# Altium PCB QUTMS_CMU_type2_v4.PcbDoc (part 1 of 2)
Units mm, origin at the board's own origin, x right, y up, seen from the top; angles counter-clockwise.
Board outline 198.55 x 64 mm, 4 copper layers (Top Layer, Signal Layer 1, Signal Layer 2, Bottom Layer), stack 0.778 mm thick; 180 components, 148 nets, 510 pads, 376 vias.
Unrouted connection lines stored in the file: 7.
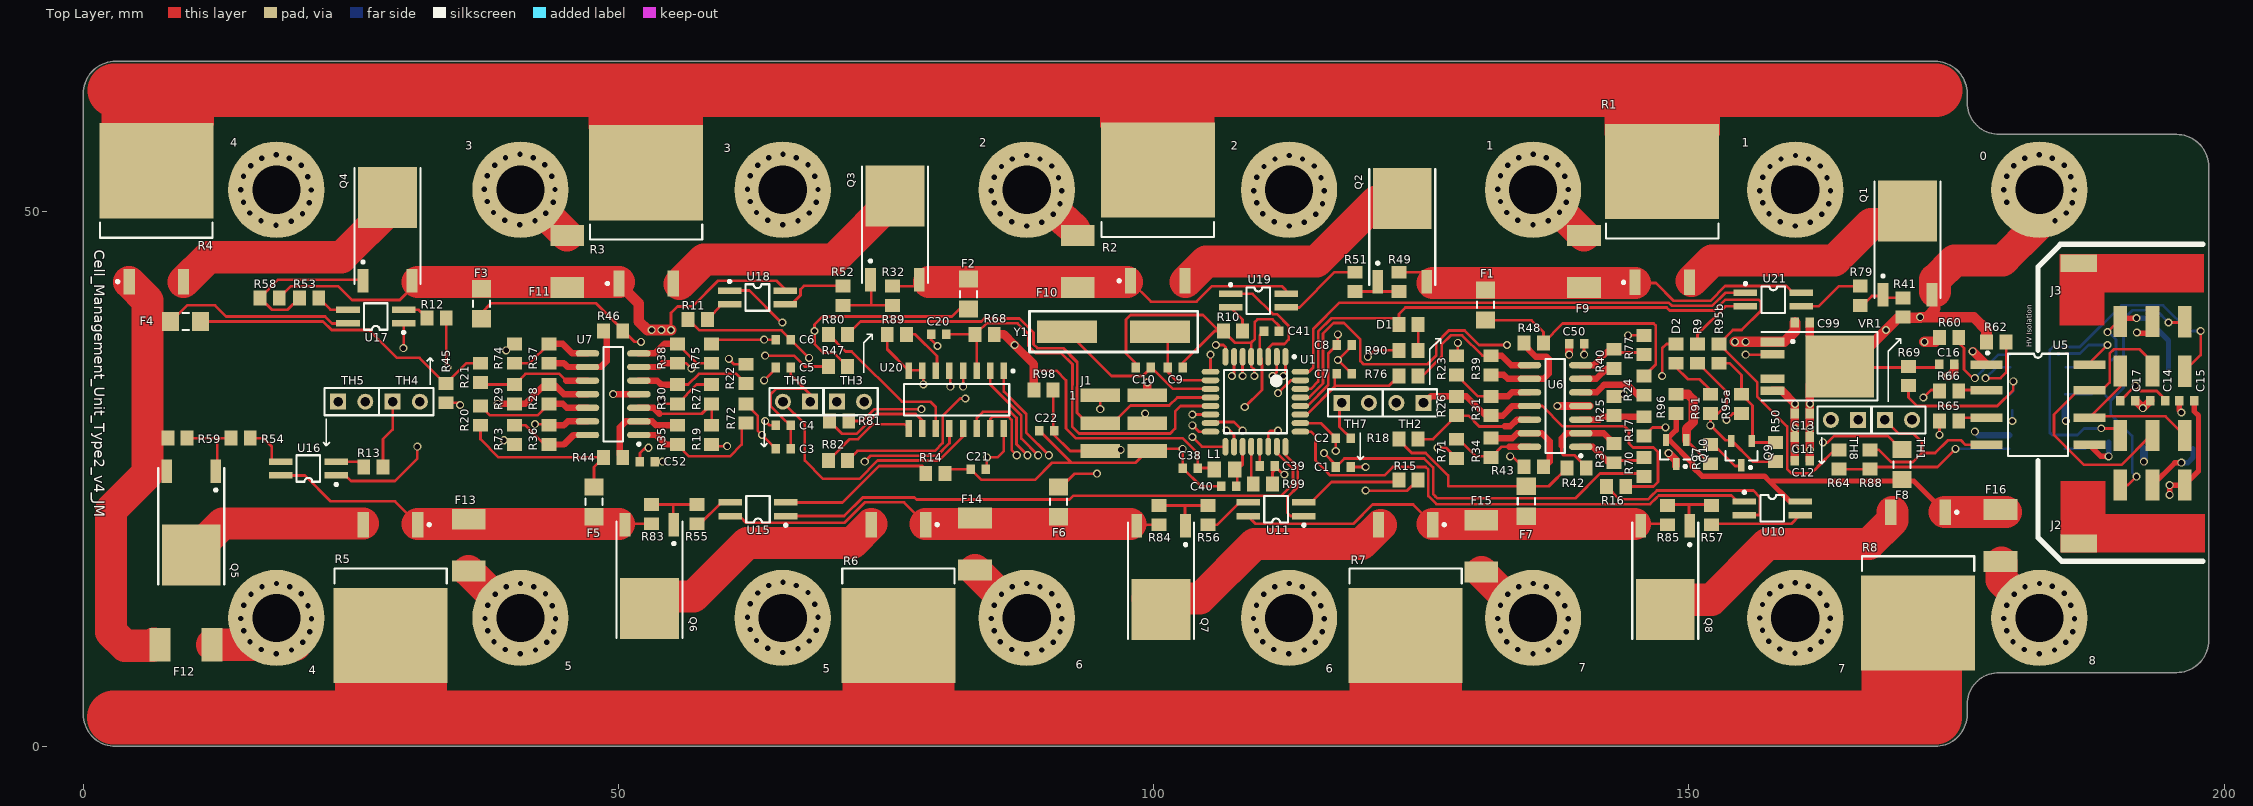
[diagram p0: Top Layer view]
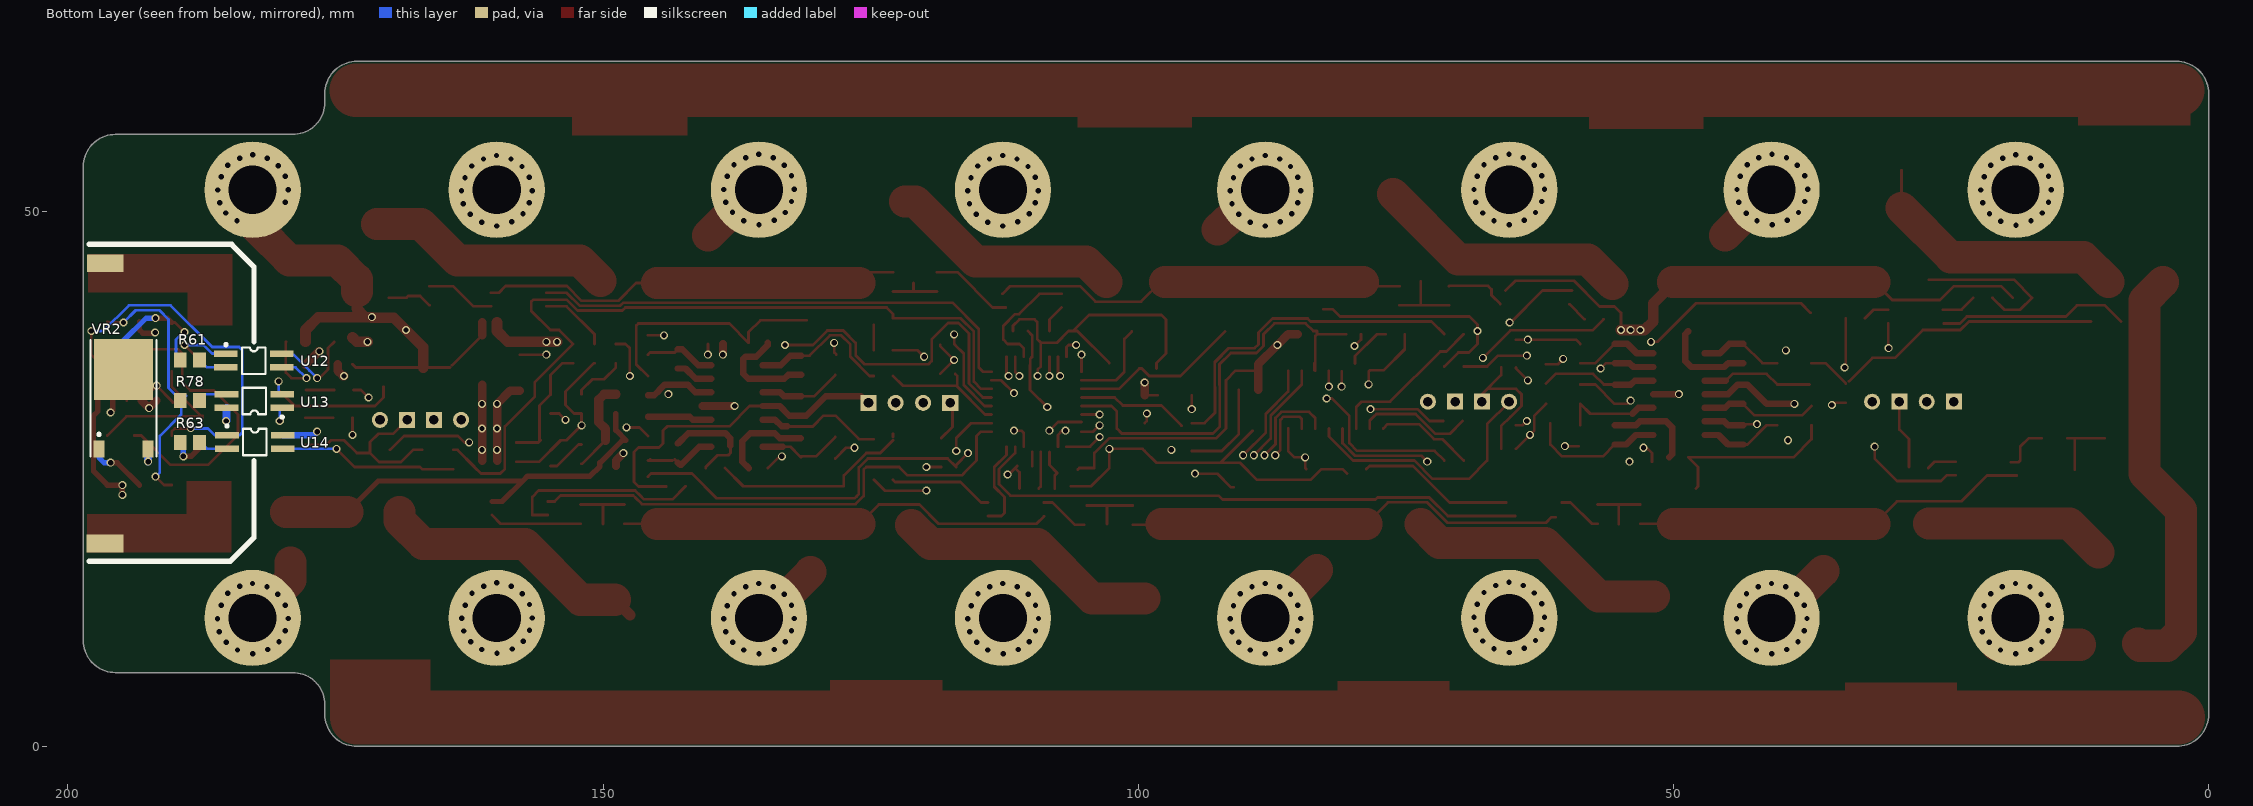
[diagram p1: Bottom Layer view, seen from below]
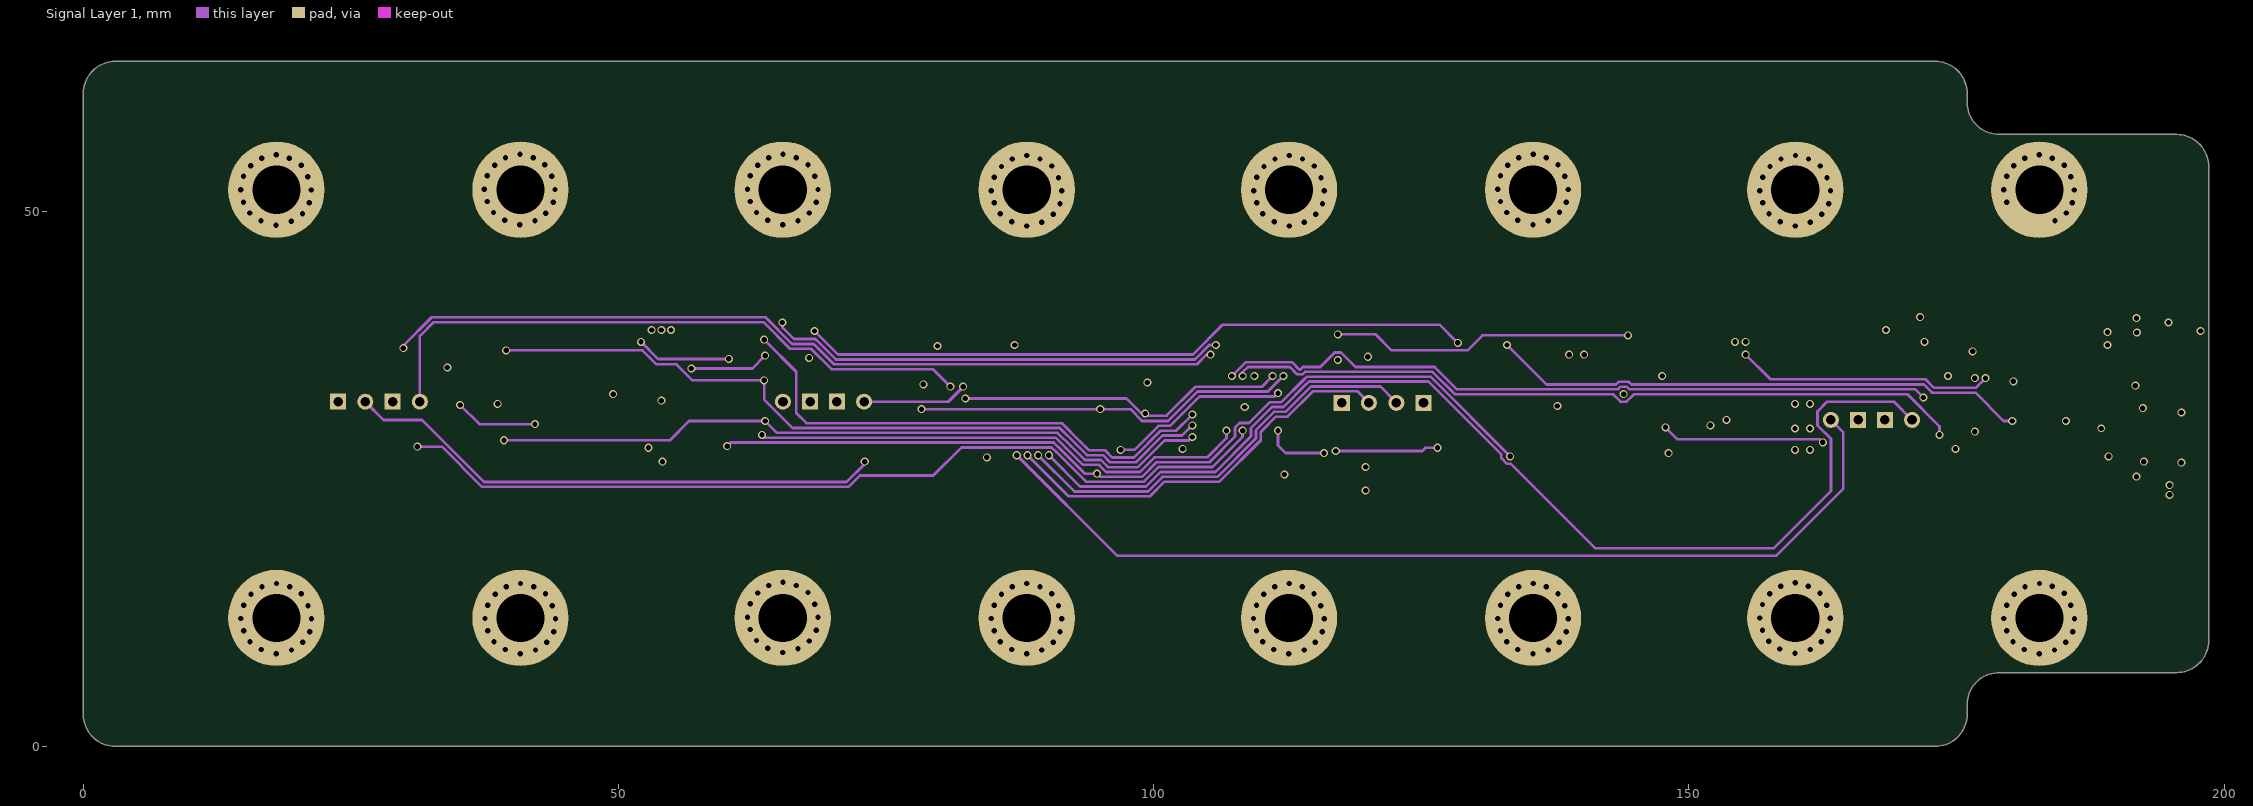
[diagram p2: Signal Layer 1]
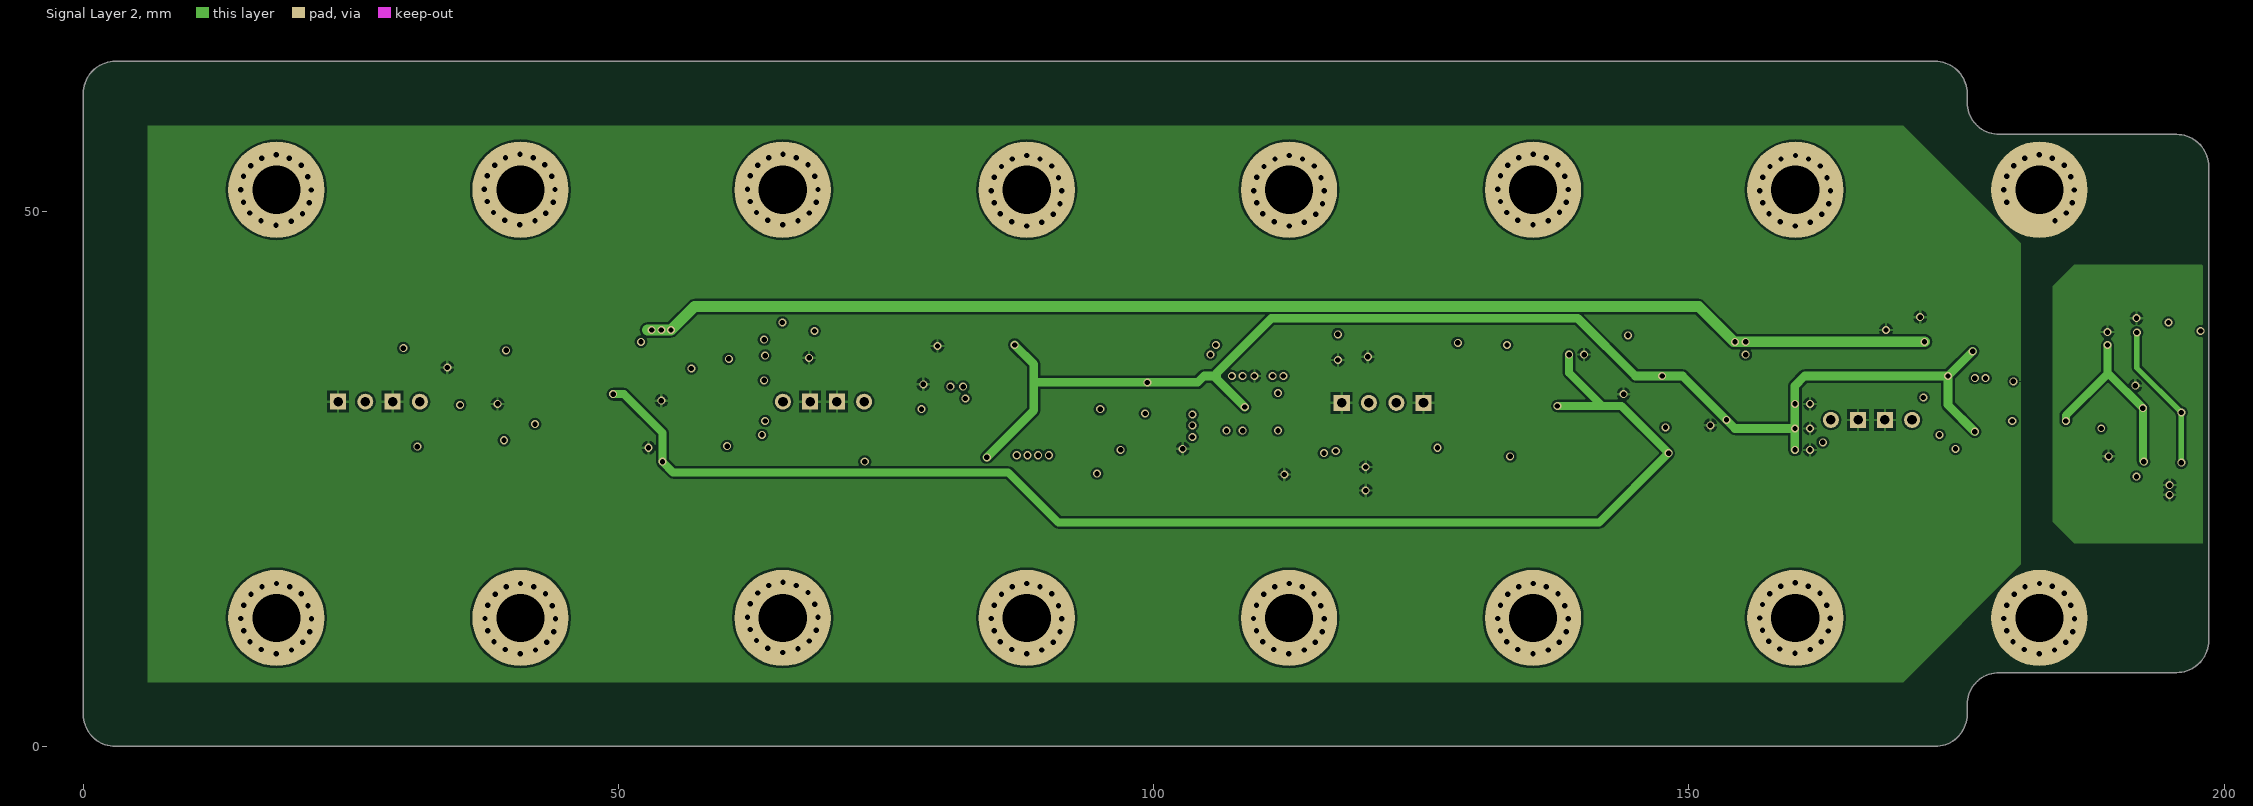
[diagram p3: Signal Layer 2]
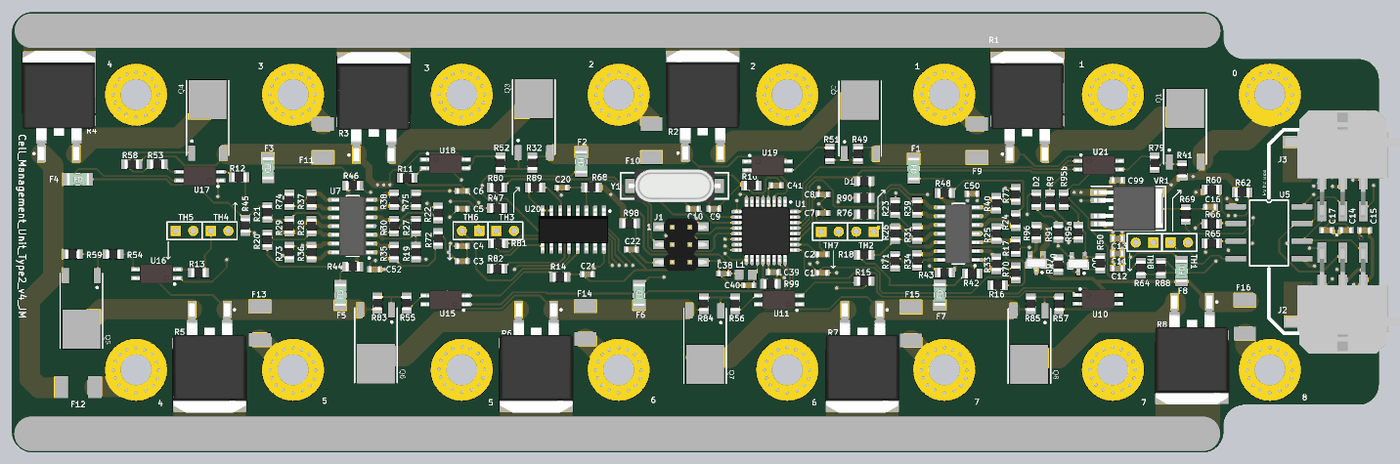
[diagram p5: 3D render of the assembled board from above, using the file's embedded part models]
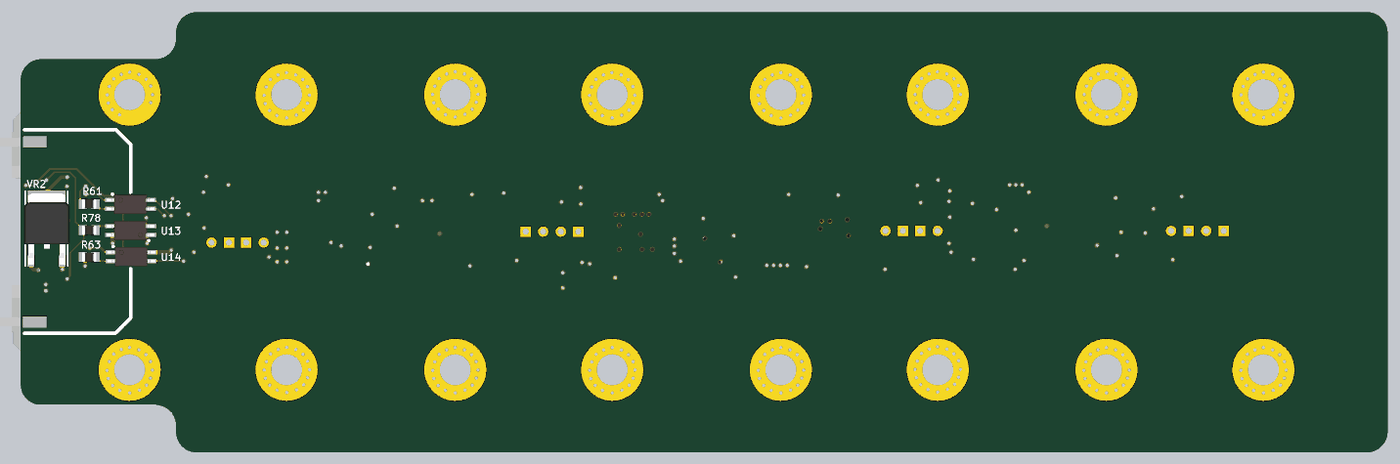
[diagram p6: 3D render of the assembled board from below, using the file's embedded part models]

## Layer stack, top to bottom
Top Solder: solder mask 0.0102, Solder Resist, Dk 3.5
Top Layer: signal copper 0.0356
Dielectric1: core 0.254, FR-4, Dk 4.2
Signal Layer 1: signal copper 0.036
Dielectric 3: prepreg 0.127, Dk 4.2
Signal Layer 2: signal copper 0.036
Dielectric 4: core 0.254, Dk 4.2
Bottom Layer: signal copper 0.0356
Bottom Solder: solder mask 0.0102, Solder Resist, Dk 3.5

## Board outline
3,0 cw(c3,3) 0,3 0,61 cw(c3,61) 3,64 172.987,64 cw(c172.987,61) 175.987,61 175.987,60.17 ccw(c178.987,60.17) 178.987,57.17 195.55,57.17 cw(c195.55,54.17) 198.55,54.17 198.55,9.895 cw(c195.55,9.895) 195.55,6.895 178.987,6.895 ccw(c178.987,3.895) 175.987,3.895 175.987,3 cw(c172.987,3) 172.987,0

## Design rules (kind name [scope] priority, off if disabled: settings)
Clearance [All] p1: gap=0.2
ComponentClearance [All] p1: gap=0 collisioncheckmode=3 verticalgap=0 showdistances=FALSE
HoleSize [All] p1: absolutevalues=TRUE maxlimit=5 minlimit=0.025 maxpercent=80.000 minpercent=20.000
NetAntennae [All] p1: netantennaetolerance=100
PolygonConnect [All] p1: connectstyle=Relief reliefconductorwidth=0.254 reliefentries=4 polygonreliefangle="90 Angle" airgapwidth=0.254
RoutingVias [All] p1: holewidth=0.711 width=1.27 viastyle="Through Hole" minholewidth=0.2 minwidth=0.4 maxholewidth=0.711 maxwidth=10
SilkToSilkClearance [All] p1: silktosilkclearance=0
SilkToSolderMaskClearance SilkscreenOverComponentPads [IsPad] p1: minsilkscreentomaskgap=0 clearancetoexposedcopper=TRUE
SolderMaskExpansion [All] p1: expansion=0.102
Width [All] p1: maxlimit=10 minlimit=0.16 preferedwidth=0.254
25 further rules are at their usual default settings.

## Components (designator, comment, footprint, x,y, rotation, side; value= is the part's Value field where it differs from the comment)
C1 "100pF" 1608[0603] 117.7,26.1 r180 top
C2 "100pF" 1608[0603] 117.7,28.8 r180 top
C3 "100pF" 1608[0603] 65.4,27.8 r180 top
C4 "100pF" 1608[0603] 65.4,30 r180 top
C5 "100pF" 1608[0603] 65.4,35.4 r180 top
C6 "100pF" 1608[0603] 65.4,38 r180 top
C7 "100pF" 1608[0603] 117.8,34.8 r180 top
C8 "100pF" 1608[0603] 117.8,37.5 r180 top
C9 "18pF" 1608[0603] 102,35.4 r180 top
C10 "18pF" 1608[0603] 99,35.4 r0 top
C11 "1uF" 1608[0603] 160.6,28.9 r180 top
C12 "100nF" 1608[0603] 160.6,26.7 r180 top
C13 "4.7uF" 1608[0603] 160.6,31.1 r180 top
C14 "100nF" 1608[0603] 193.8,32.3 r180 top
C15 "0603" 1608[0603] 196.5,32.3 r0 top
C16 "100nF" 1608[0603] 174.1,35.7 r0 top
C17 "100nF" 1608[0603] 191,32.3 r0 top
C20 "0603" 1608[0603] 79.9,38.5 r0 top
C21 "100nF" 1608[0603] 83.6,25.9 r0 top
C22 "100nF" 1608[0603] 90,29.5 r0 top
C38 "1uF" 1608[0603] 103.4,26 r180 top
C39 "100nF" 1608[0603] 110.6,26.2 r0 top
C40 "100nF" 1608[0603] 107,24.3 r180 top
C41 "100nF" 1608[0603] 111,38.8 r0 top
C50 "100nF" 1608[0603] 139.5,37.6 r180 top
C52 "100nF" 1608[0603] 52.7,26.6 r0 top
C99 "1uF" 1608[0603] 160.6,39.6 r180 top
D1 "LED2" 2012[0805]_RES 123.8,39.4 r0 top
D2 "PWR" 2012[0805]_RES 148.8,36.7 r270 top
F1 "Fuse 1" 3216[1206]#1 131,41.2 r180 top
F2 "Fuse 1" 3216[1206]#1 82.7,42.2 r180 top
F3 "Fuse 1" 3216[1206]#1 37.2,41.3 r180 top
F4 "Fuse 1" 3216[1206]#1 9.6,39.7 r270 top
F5 "Fuse 1" 3216[1206]#1 47.7,22.9 r0 top
F6 "Fuse 1" 3216[1206]#2 91.1,22.9 r180 top
F7 "Fuse 1" 3216[1206]#1 134.8,22.95 r0 top
F8 "Fuse 1" 3216[1206]#1 169.9,26.375 r0 top
F9 "Fuse 1" 6426[2410]_Fuse 140.2,45.3 r0 top
F10 "Fuse 1" 6426[2410]_Fuse 92.9,45.3 r0 top
F11 "Fuse 1" 6426[2410]_Fuse 45.2,45.3 r0 top
F12 "Fuse 1" 6426[2410]_Fuse 9.6,9.5 r270 top
F13 "Fuse 1" 6426[2410]_Fuse 36,18.8 r180 top
F14 "Fuse 1" 6426[2410]_Fuse 83.3,18.9 r180 top
F15 "Fuse 1" 6426[2410]_Fuse 130.6,18.7 r180 top
F16 "Fuse 1" 6426[2410]_Fuse 179.1,19.7 r180 top
J1 "ISP header" "ISP HEADER" 97.2,30.2 r270 top
J2 "Molex Connector" MOLEX_6H_2 193.3,24.4 r270 top
J3 "Molex Connector" MOLEX_6H_1 193.3,39.7 r90 top
L1 "10uH" 2012[0805]_IND 105,26.6 r270 top
Q1 "" 369A-13 170.415,46.3 r0 top
Q2 "" 369A-13 123.215,47.5 r0 top
Q3 "" 369A-13 75.815,47.7 r0 top
Q4 "" 369A-13 28.415,47.6 r0 top
Q5 "" 369A-13 10.085,21.6 r180 top
Q6 "" 369A-13 52.885,16.6 r180 top
Q7 "" 369A-13 100.685,16.5 r180 top
Q8 "" 369A-13 147.785,16.5 r180 top
Q9 "2N7002" SOT23_N 154.9,27.4 r270 top
Q10 "MOSFET-P" SOT23_N 148.8,27.5 r270 top
R1 "4R7" D2PAK_N 147.5,50.15 r90 top
R2 "4R7" D2PAK_N 100.375,50.295 r90 top
R3 "4R7" D2PAK_N 52.575,50.045 r90 top
R4 "4R7" D2PAK_N 6.825,50.22 r90 top
R5 "4R7" D2PAK_N 28.7,13.92 r270 top
R6 "4R7" D2PAK_N 76.15,13.92 r270 top
R7 "4R7" D2PAK_N 123.525,13.92 r270 top
R8 "4R7" D2PAK_N 171.4,15.07 r270 top
R9 "1k" 2012[0805]_RES 150.8,36.7 r90 top
R10 "1k" 2012[0805]_RES 107.4,38.8 r0 top
R11 "1k" 2012[0805]_RES 57.4,39.9 r0 top
R12 "1k" 2012[0805]_RES 33,40 r180 top
R13 "1k" 2012[0805]_RES 27.1,26.1 r180 top
R14 "1k" 2012[0805]_RES 79.6,25.5 r180 top
R15 "1k" 2012[0805]_RES 123.8,24.9 r180 top
R16 "1k" 2012[0805]_RES 143.2,24.3 r180 top
R17 "560k" 2012[0805]_RES 145.8,29.9 r90 top
R18 "560k" 2012[0805]_RES 123.8,28.7 r0 top
R19 "560k" 2012[0805]_RES 58.7,29.1 r90 top
R20 "560k" 2012[0805]_RES 37.1,30.9 r90 top
R21 "560k" 2012[0805]_RES 37.1,34.9 r270 top
R22 "560k" 2012[0805]_RES 61.9,34.8 r270 top
R23 "560k" 2012[0805]_RES 128.3,35.6 r270 top
R24 "560k" 2012[0805]_RES 145.8,33.7 r270 top
R25 "560k" 2012[0805]_RES 143,31.8 r90 top
R26 "560k" 2012[0805]_RES 128.3,31.8 r90 top
R27 "560k" 2012[0805]_RES 58.7,32.9 r90 top
R28 "560k" 2012[0805]_RES 43.5,32.9 r90 top
R29 "560k" 2012[0805]_RES 40.3,32.9 r270 top
R30 "560k" 2012[0805]_RES 55.5,32.9 r270 top
R31 "560k" 2012[0805]_RES 131.5,31.8 r270 top
R32 "47k" 2012[0805]_RES 75.6,42.1 r270 top
R33 "560k" 2012[0805]_RES 143,27.4 r270 top
R34 "560k" 2012[0805]_RES 131.5,27.9 r270 top
R35 "560k" 2012[0805]_RES 55.5,29.1 r270 top
R36 "560k" 2012[0805]_RES 43.5,29.1 r270 top
R37 "560k" 2012[0805]_RES 43.5,36.7 r90 top
R38 "560k" 2012[0805]_RES 55.5,36.7 r90 top
R39 "560k" 2012[0805]_RES 131.5,35.6 r90 top
R40 "560k" 2012[0805]_RES 143,36.2 r90 top
R41 "47k" 2012[0805]_RES 170,41 r90 top
R42 "560k" 2012[0805]_RES 139.5,26 r0 top
R43 "560k" 2012[0805]_RES 135.5,26.125 r0 top
R44 "560k" 2012[0805]_RES 49.5,27 r0 top
R45 "560k" 2012[0805]_RES 33.9,33 r270 top
R46 "560k" 2012[0805]_RES 49.5,38.8 r180 top
R47 "560k" 2012[0805]_RES 70.5,35.5 r180 top
R48 "560k" 2012[0805]_RES 135.5,37.7 r180 top
R49 "47k" 2012[0805]_RES 122.9,43.4 r270 top
R50 "47k" 2012[0805]_RES 158.1,27.5 r90 top
R51 "10k" 2012[0805]_RES 118.8,43.4 r90 top
R52 "10k" 2012[0805]_RES 70.975,42.1 r90 top
R53 "10k" 2012[0805]_RES 21.1,41.9 r0 top
R54 "10k" 2012[0805]_RES 14.7,28.8 r0 top
R55 "10k" 2012[0805]_RES 57.325,21.7 r270 top
R56 "10k" 2012[0805]_RES 105.05,21.6 r270 top
R57 "10k" 2012[0805]_RES 152.1,21.6 r270 top
R58 "47k" 2012[0805]_RES 17.4,41.9 r0 top
R59 "47k" 2012[0805]_RES 8.8,28.8 r0 top
R60 "1k" 2012[0805]_RES 174.3,38.2 r180 top
R61 "1k" 2012[0805]_RES 188.6,36.1 r0 bottom
R62 "47k" 2012[0805]_RES 178.7,37.8 r180 top
R63 "1k" 2012[0805]_RES 188.6,28.4 r0 bottom
R64 "1k" 2012[0805]_RES 164,26.8 r90 top
R65 "1k" 2012[0805]_RES 174.3,30.4 r180 top
R66 "1k" 2012[0805]_RES 174.3,33.2 r180 top
R68 "4k7" 2012[0805]_RES 84.2,38.5 r0 top
R69 "1k" 2012[0805]_RES 170.5,34.6 r270 top
R70 "4k7" 2012[0805]_RES 145.8,26.1 r270 top
R71 "4k7" 2012[0805]_RES 128.3,27.8 r270 top
R72 "4k7" 2012[0805]_RES 61.9,31.1 r90 top
R73 "4k7" 2012[0805]_RES 40.3,29.1 r270 top
R74 "4k7" 2012[0805]_RES 40.3,36.7 r90 top
R75 "4k7" 2012[0805]_RES 58.7,36.7 r90 top
R76 "4k7" 2012[0805]_RES 123.8,34.6 r180 top
R77 "4k7" 2012[0805]_RES 145.8,37.5 r90 top
R78 "330R" 2012[0805]_RES 188.6,32.3 r0 bottom
R79 "10k" 2012[0805]_RES 166,42.1 r90 top
R80 "10k" 2012[0805]_RES 70.5,38.5 r180 top
R81 "10k" 2012[0805]_RES 70.6,30.4 r180 top
R82 "10k" 2012[0805]_RES 70.5,26.7 r180 top
R83 "47k" 2012[0805]_RES 53.1,21.7 r90 top
R84 "47k" 2012[0805]_RES 100.5,21.6 r90 top
R85 "47k" 2012[0805]_RES 148,21.6 r90 top
R88 "47k" 2012[0805]_RES 166.9,26.8 r270 top
R89 "0805" 2012[0805]_RES 76,38.5 r180 top
R90 "270R" 2012[0805]_RES 123.8,37 r0 top
R91 "270R" 2012[0805]_RES 152,32 r270 top
R95a "10k" 2012[0805]_RES 154.9,32 r90 top
R95b "10k" 2012[0805]_RES 152.8,36.7 r270 top
R96 "22k" 2012[0805]_RES 148.8,32 r90 top
R97 "47k" 2012[0805]_RES 152,27.3 r270 top
R98 "10k" 2012[0805]_RES 89.7,33.3 r180 top
R99 "10R" 2012[0805]_RES 110.2,24.5 r180 top
TH1 "Res Thermal" HDR1X2 168.3,30.5 r0 top
TH2 "Res Thermal" HDR1X2 125.2,32.1 r180 top
TH3 "Res Thermal" HDR1X2 70.4,32.2 r0 top
TH4 "Res Thermal" HDR1X2 28.9,32.2 r0 top
TH5 "Res Thermal" HDR1X2 23.8,32.2 r0 top
TH6 "Res Thermal" HDR1X2 67.9,32.2 r180 top
TH7 "Res Thermal" HDR1X2 117.56,32.1 r0 top
TH8 "Res Thermal" HDR1X2 165.8,30.5 r180 top
U1 "ATmega64M1-16AU" 32A_N 109.5,32.2 r270 top
U5 "ISO1050" DUB8 182.6,35.8 r270 top
U6 "MC33174D" SO14_N 137.5,31.8 r180 top
U7 "MC33174D" SO14_N 49.5,32.9 r180 top
U10 "Optoisolator1" SO4 157.8,23.5 r270 top
U11 "Optoisolator1" SO4 111.4,20.9 r90 top
U12 "Optoisolator3" SO4 182.6,37.3 r270 bottom
U13 "Optoisolator4" SO4 182.6,31 r90 bottom
U14 "Optoisolator1" SO4 182.5,29.7 r270 bottom
U15 "Optoisolator1" SO4 63,20.9 r90 top
U16 "Optoisolator1" SO4 21,24.7 r90 top
U17 "Optoisolator1" SO4 27.3,38.9 r90 top
U18 "Optoisolator1" SO4 63,43.2 r270 top
U19 "Optoisolator1" SO4 109.8,42.9 r270 top
U20 "74HC4051" SO-16 81.6,32.4 r270 top
U21 "Optoisolator1" SO4 157.9,43 r270 top
VR1 "5V LDO INH Reg" DPAK-5 164.1,35.5 r270 top
VR2 "MC78M05BDTRK" D2PAK 194.8,35.2 r180 bottom
Y1 "16MHz" CRYSTAL 103.4,39.8 r180 top

## Footprints (in the part's own frame and the unit in brackets; to place one, negate y for a bottom-side part, rotate by r counter-clockwise, add the part's x,y. Pads: shape width x height; smd on the part's side, far side on the other; paste and mask are expansions set on the pad)
32A_N [mm] "Thin QFP, 32-Leads, Body 7x7mm, Pitch 0.8mm, IPC Medium Density"
  oval 1.65x0.55 smd: 1(-4.2,2.8) 2(-4.2,2) 3(-4.2,1.2) 4(-4.2,0.4) 5(-4.2,-0.4) 6(-4.2,-1.2) 7(-4.2,-2) 8(-4.2,-2.8) 17(4.2,-2.8) 18(4.2,-2) 19(4.2,-1.2) 20(4.2,-0.4) 21(4.2,0.4) 22(4.2,1.2) 23(4.2,2) 24(4.2,2.8)
  oval 0.55x1.65 smd: 9(-2.8,-4.2) 10(-2,-4.2) 11(-1.2,-4.2) 12(-0.4,-4.2) 13(0.4,-4.2) 14(1.2,-4.2) 15(2,-4.2) 16(2.8,-4.2) 25(2.8,4.2) 26(2,4.2) 27(1.2,4.2) 28(0.4,4.2) 29(-0.4,4.2) 30(-1.2,4.2) 31(-2,4.2) 32(-2.8,4.2)
  silkscreen extent -4.32,-2.95 2.95,3.75, body extent -4.5,-4.5 4.5,4.5, height 1.1
369A-13 [mm] "D-PAK/TO-252-AA; 3 Leads (1 Cropped); Body 10.3 (inc. leads) x 6.7 mm (LxW max)"
  rect 1x2.2 smd: 1(-2.285,-4.1) 3(2.285,-4.1)
  rect 5.5x5.7 smd: 4(0,3.7)
  silkscreen extent -3.09,-4.4 3.09,6.45
1608[0603] [mm] "Chip Capacitor, Body 1.6x0.8mm, IPC High Density"
  rect 0.8x0.9 smd: 1(-0.7,0) 2(0.7,0)
  body extent -0.85,-0.45 0.85,0.45, height 0.9
2012[0805]_IND [mm]
  rect 1.5x1.3 smd: 1(0.75,0.65) 2(0.748,2.566)
  body extent 0.1,0.2 1.4,3, height 1.5
2012[0805]_RES [mm] "2012[0805] Resistor"
  rect 1.2x1.4 smd: 1(-0.9,0) 2(0.9,0)
  body extent -1.05,-0.67 1.05,0.68, height 0.6
3216[1206]#1 [mm] "Fuse"
  rect 1.8x1.6 smd: 1(0,1.35) 2(0,-1.45)
  silkscreen extent -0.8,-0.35 0.8,0.25, body extent -0.83,-1.63 0.82,1.63, height 0.4
3216[1206]#2 [mm] "Fuse"
  rect 1.8x1.6 smd: 1(0,-1.35) 2(0,1.45)
  silkscreen extent -0.8,-0.25 0.8,0.35, body extent -0.83,-1.63 0.82,1.63, height 0.4
6426[2410]_Fuse [mm] "6426[2410] Fuse"
  rect 3.15x1.95 smd: 1(0,-2.425) 2(0,2.425)
  body extent -1.35,-3.05 1.35,3.05, height 2.7
CRYSTAL [mm]
  rect 5.6x2.1 smd: 1(2.8,1.05) 2(11.5,1.05)
  silkscreen extent -0.7,-0.85 15,2.95, body extent 0.45,-1.35 13.85,3.45, height 4
D2PAK [mm] "78M05 Regulator"
  rect 1x1.6 smd: 1(-2.285,-7.4) 3(2.285,-7.4)
  rect 5.5x5.7 smd: 4(0,0)
  silkscreen extent -3.09,-8.1 3.08,2.75, body extent -3.3,-7.92 3.38,2.48, height 2.4
D2PAK_N [mm] "D2-PAK, 4-Leads, Body 8.8x10.4mm, Pitch 2.54mm, Lead Span 15.1mm, IPC Medium Density"
  rect 2.4x1.05 smd: 1(-6.8,2.54) 3(-6.8,-2.54)
  rect 8.9x10.65 smd: 2(3.55,0)
  silkscreen extent -6.92,-5.25 -1.3,5.25, body extent -7.72,-5.31 8.13,5.33, height 4.8
DPAK-5 [mm] "Small Outline; 6 Leads (1 Absent); Body Width 4.4 mm; Pitch 1.27 mm"
  rect 0.8x2.2 smd: 1(-2.28,-6.3) 2(-1.14,-6.3) 4(1.14,-6.3) 5(2.28,-6.3)
  rect 5.8x6.4 smd: 3(0,0)
  silkscreen extent -3.2,-7.3 3.2,3.5, body extent -3.25,-6.9 3.25,3, height 2.3
DUB8 [mm]
  rect 0.8x3 smd: 1(0.127,-4.8) 2(2.545,-4.8) 3(5.085,-4.8) 4(7.625,-4.8) 5(7.625,4.8) 6(5.085,4.8) 7(2.545,4.8) 8(0.127,4.8)
  silkscreen extent -1.07,-4.82 8.68,2.8
HDR1X2 [mm] "Connector; Header; 2 Position"
  rect 1.5x1.5 hole 0.9: 1(0,0)
  round 1.5 hole 0.9: 2(2.54,0)
  silkscreen extent -1.27,-1.27 3.81,1.27
"ISP HEADER" [mm]
  rect 1.27x3.68 smd: 1(-2.6,-2.2) 2(-2.6,2.2) 3(0,-2.2) 4(0,2.2) 5(2.6,-2.2) 6(2.6,2.2)
  body extent -3.81,-3.75 3.81,3.75, height 9.7
MOLEX_6H_1 [mm]
  rect 1.65x3.43 smd: 0(5.45,6.9)
  rect 1.65x3.43 smd far side: 0(5.45,-3.2)
  rect 2.92x1.27 smd: 1(-0.011,3.002) 2(-0.011,0.002) 3(-0.02,-3) 4(-4.641,3.002) 5(-4.641,0.002) 6(-4.65,-3)
  body extent -5.37,-8.32 10.03,8.33, height 8.73
MOLEX_6H_2 [mm]
  rect 1.65x3.43 smd far side: 0(5.45,3.225)
  rect 1.65x3.43 smd: 0(5.45,-6.875)
  rect 2.92x1.27 smd: 1(-0.011,3.002) 2(-0.011,0.002) 3(-0.02,-3) 4(-4.641,3.002) 5(-4.641,0.002) 6(-4.65,-3)
  body extent -5.37,-8.32 10.03,8.33, height 8.73
SO4 [mm] "Small Outline; 8 Leads; Body Width 3.9 mm; Pitch 1.27 mm"
  rect 0.6x2.2 smd: 1(0.619,-2.625) 2(1.889,-2.625) 3(1.889,2.575) 4(0.619,2.575)
  silkscreen extent -0.36,-2.75 2.5,1.07, body extent -0.17,-3.5 2.67,3.5, height 2.21
SO14_N [mm] "SOIC, 14-Leads, Body 8.7x3.9mm, Pitch 1.27mm, IPC Medium Density"
  oval 2.2x0.6 smd: 1(-2.4,3.81) 2(-2.4,2.54) 3(-2.4,1.27) 4(-2.4,0) 5(-2.4,-1.27) 6(-2.4,-2.54) 7(-2.4,-3.81) 8(2.4,-3.81) 9(2.4,-2.54) 10(2.4,-1.27) 11(2.4,0) 12(2.4,1.27) 13(2.4,2.54) 14(2.4,3.81)
  silkscreen extent -2.53,-4.4 0.9,4.78, body extent -3.02,-4.32 3.02,4.32, height 1.62
SO-16 [mm]
  rect 1.55x0.6 smd: 1(-2.7,4.394) 2(-2.7,3.124) 3(-2.7,1.854) 4(-2.7,0.584) 5(-2.7,-0.686) 6(-2.7,-1.956) 7(-2.7,-3.226) 8(-2.7,-4.496) 9(2.7,-4.496) 10(2.7,-3.226) 11(2.7,-1.956) 12(2.7,-0.686) 13(2.7,0.584) 14(2.7,1.854) 15(2.7,3.124) 16(2.7,4.394)
  silkscreen extent -2.8,-4.92 1.47,5.38, body extent -3.08,-5.09 3.08,4.99, height 2
SOT23_N [mm] "SOT23, 3-Leads, Body 2.9x1.3mm, Pitch 0.95mm, Lead Span 2.3mm - Reverse Pinning, IPC Medium Density"
  rect 1.15x0.6 smd: 1(-1.125,0.95) 2(-1.125,-0.95) 3(1.125,0)
  silkscreen extent -0.2,-1.5 1.47,1.5, body extent -1.15,-1.5 1.15,1.5, height 1.1

## Part data
C1 C2 C3 C4 C5 C6 C7 C8 C9 C10 C11 C12 C13 C14 C16 C17 C21 C22 C38 C39 C40 C41 C50 C52 C99: library part "Cap Semi", "0603"
C15: library part "Cap Semi", "1uF"
C20: library part "Cap Semi", "47nF"
D1: "Typical RED, GREEN, YELLOW, AMBER GaAs LED"
D2: library part LED2, "Typical RED, GREEN, YELLOW, AMBER GaAs LED"
F1 F2 F3 F4 F5 F6 F7 F8 F9 F10 F11 F12 F13 F14 F15 F16: "Fuse"
J1: library part "Header 3X2", "Header, 3-Pin, Dual row"
J2 J3: library part "Header 3X2A", "Header, 3-Pin, Dual row"
L1: library part Inductor, "0805"
Q9: library part MOSFET-N, "N-Channel MOSFET"
Q10: "P-Channel MOSFET"
R1 R2 R3 R4 R5 R6 R7 R8: library part Res1, "Power Resistor SMD"
R9 R10 R11 R12 R13 R14 R15 R16 R17 R18 R19 R20 R21 R22 R23 R24 R25 R26 R27 R28 R29 R30 R31 R32 R33 R34 R35 R36 R37 R38 R39 R40 R41 R42 R43 R44 R45 R46 R47 R48 R49 R50 R51 R52 R53 R54 R55 R56 R57 R58 R59 R60 R61 R62 R63 R64 R65 R66 R68 R69 R78 R79 R80 R81 R82 R83 R84 R85 R90 R91 R95a R95b R96 R97 R98 R99: library part Res1, "0805"
R70 R71 R72 R73 R74 R75 R76 R77 R88: library part Res3, "0805"
R89: library part Res1, "1k"
TH1 TH2 TH3 TH4 TH5 TH6 TH7 TH8: "Thermistor"
U1: library part ATmega8-16AC, "8-Bit AVR Microcontroller with 8K Bytes of In-System Programmable Flash Memory"
U5: library part AT90S2343-10SI, "Isolated CAN transceiver"
U6 U7: "Low-Power Quad Bipolar Operational Amplifier"
U10 U11 U14 U15 U16 U17 U18 U19 U21: "4-Pin Phototransistor Optocoupler"
U12 U13: library part Optoisolator1, "4-Pin Phototransistor Optocoupler"
U20: library part AD539KN, "Wideband Dual-Channel Linear Multiplier/Divider"
VR1: library part "IFX25401TE V50", "IC REG LDO 5V 0.4A TO252-5"
VR2: "Three-Terminal Medium Current Positive Voltage Regulator"
Y1: library part XTAL, "Crystal Oscillator"

## Free pads (board coordinates)
  round 9 hole 4.5: ""(18.035,12) ""(18.035,52) ""(40.835,12) ""(40.835,52) ""(65.335,12) ""(65.335,52) ""(88.135,12) ""(88.135,52) ""(112.635,12) ""(112.635,52) ""(135.435,12) ""(135.435,52) ""(159.935,12) ""(159.935,52) ""(182.735,12) ""(182.735,52)

## Via types
v1: diameter 0.8, hole 0.5, Top Layer to Bottom Layer, tented both sides, 253 vias
v2: diameter 0.75, hole 0.5, Top Layer to Bottom Layer, tented both sides, 122 vias
v3: diameter 0.7, hole 0.5, Top Layer to Bottom Layer, tented both sides, 1 vias

## Nets (pads, with @x,y where several pads share a name; then routed paths per layer and width w, separated by ;. In a path a pad name is that pad's centre, name@x,y a point inside that pad or via, vN(x,y) a via of type N, cw(c..) or ccw(c..) an arc to the next point about the centre after c; other vN are vias at no path point)
5V_GLV: C14.2 C17.2 U5.8 U12.1 U13.4 VR2.3 | length 30
  Top Layer w0.254: U5.8@187.4,35.673 187.4,35.9 187.5,35.9 187.85,36.25 v2(189.1,37.5) ; C17.2@191.6,32.1 C17.2@191.8,32.1
  Top Layer w0.75: C17.2@191.7,32.3 v2(192.4,31.6) C14.2@193.1,32.3
  Signal Layer 2 w0.75: v2(185.2,30.4) 185.2,30.901 189.1,34.8 ; v2(189.1,37.5) 189.1,34.9 v2(192.4,31.6) 192.4,26.7 v2(192.5,26.6)
  Bottom Layer w0.254: U12.1@184.433,36.681 184.514,36.6 U12.1@184.614,36.7 ; U12.1@185.2,36.7 186.538,36.7 187.337,37.5 v2(189.1,37.5)
  Bottom Layer w0.75: v2@185.175,30.425 U13.4@185.175,31.619 ; v2(192.5,26.6) VR2.3@192.5,27.785
5V_HV: C11.2 C12.2 C13.2 C16.2 C21.2 C38.1 C41.1 D2.1 J1.2 L1.1 R68.2 R95a.1 R98.2 U1.4 U5.1 U14.4 U20.16 VR1.5 | length 193
  Top Layer w0.254: C21.2@84.3,25.9 84.4,26 v2(84.4,27) 85.4,27 85.994,27.594 U20.16@85.994,29.7 ; 88.8,35.1 90.9,35.1 91.8,34.2 91.8,29.7 92.716,28.784 102.716,28.784 104.1,27.4 C38.1@104.1,26 105.5,26 L1.1@105.65,25.85 ; J1.2@98.2,32.8 J1.2@99.4,32.8 ; v2(108.5,31.7) 110.102,33.302 110.102,35.597 110.098,35.601 110.098,36.202 U1.4@109.9,36.4 109.9,38.4 C41.1@110.3,38.8 ; v2(147.5,34.6) 147.5,37.2 147.9,37.6 D2.1@148.8,37.6 ; v2(153.5,30.5) 154.1,31.1 R95a.1@154.9,31.1
  Top Layer w0.8: R68.2@85.1,38.5 86,38.5 v2(87,37.5) 88.8,35.7 R98.2@88.8,33.3 ; J1.2@99.4,32.8 v2(99.4,34) ; VR1.5@157.8,33.22 158.68,33.22 v2(159.9,32) v2(159.9,29.7) ; C12.2@159.9,26.7 v2(159.9,29.7) ; C11.2@159.9,28.8 v2(159.9,29.7) ; v2(174.2,34.6) 174.3,34.6 174.8,35.1 C16.2@174.8,35.7 ; v2(176.5,36.9) 176.552,36.9 177.778,35.673 U5.1@177.8,35.673
  Signal Layer 2 w0.8: v2(84.4,27) 88.8,31.4 88.8,35.7 v2(87,37.5) ; 88.8,34 v2(99.4,34) 104.1,34 104.7,34.6 105.6,34.6 v2(108.5,31.7) ; 105.9,34.6 105.9,34.9 111,40 139.6,40 145,34.6 v2(147.5,34.6) 149.4,34.6 v2(153.5,30.5) 154.3,29.7 v2(159.9,29.7) ; v2(159.9,27.7) v2(159.9,29.7) ; v2(176.5,36.9) v2(174.2,34.6) ; v2(176.7,29.4) 174.2,31.9 v2(174.2,34.6) ; v2(159.9,29.7) v2(159.9,32) 159.9,33.7 160.8,34.6 v2(174.2,34.6)
  Bottom Layer w0.6: v2(176.7,29.4) 177.019,29.081 U14.4@179.925,29.081
AGND: R99.2 U1.20 | length 3.5
  Top Layer w0.254: U1.20@109.1,27.5 109.1,24.3 R99.2@109.3,24.1
AMP_PWR: C50.2 C52.2 Q10.3 U6.4 U7.4 | length 134
  Top Layer w0.6: v2(49.5,32.9) U7.4@51.9,32.9
  Top Layer w0.75: v2(137.7,31.8) U6.4@140.7,31.8 ; v2(138.8,36.6) C50.2@138.8,37.6 ; v2(148.1,27.4) 148.8,26.7 Q10.3@148.8,26.2
  Signal Layer 2 w0.75: v2(49.5,32.9) 50.5,32.9 54.1,29.3 v2(54.1,26.6) 55.1,25.6 86.4,25.6 91.1,20.9 141.6,20.9 v2(148.1,27.4) 143.7,31.8 141.9,31.8 ; v2(137.7,31.8) 141.9,31.8 ; v2(138.8,36.6) 138.8,34.9 141.9,31.8
AREF: C39.1 U1.21 | length 1.3
  Top Layer w0.254: C39.1@109.9,26.2 U1.21@109.9,27.5
AVCC: C40.1 L1.2 U1.19 | length 3.8
  Top Layer w0.254: C40.1@107.8,24.1 107.8,25.318 107.566,25.552 108.3,26.286 U1.19@108.3,27.5
BAL_1: Q1.4 R1.3 | length 23.1
  Top Layer w3: R1.3@150.22,43.48 152.14,45.4 163.605,45.4 167.005,48.8 Q1.4@171.1,48.8
BAL_2: Q2.4 R2.3 | length 22
  Top Layer w3: R2.3@102.961,43.373 104.887,45.3 115.2,45.3 120.8,50.9 Q2.4@121.8,50.9
BAL_3: Q3.4 R3.3 | length 24
  Top Layer w3: 55.7,43.2 58,45.5 70.1,45.5 Q3.4@76.2,51.6
BAL_4: Q4.4 R4.3 | length 25.7
  Top Layer w0.254: Q4.4@28.7,50.3 Q4.4@28.7,53.82
  Top Layer w3: R4.3@9.365,43.37 11.695,45.7 24.1,45.7 Q4.4@28.7,50.3
BAL_5: Q5.4 R5.3 | length 16.9
  Top Layer w3: Q5.4@10.3,18.1 13.015,20.815 R5.3@26.115,20.815
BAL_6: Q6.4 R6.3 | length 24.6
  Top Layer w3: Q6.4@51.8,14 57,14 62,19 71.84,19 R6.3@73.61,20.77
BAL_7: Q7.4 R7.3 | length 24.7
  Top Layer w3: Q7.4@99.4,13.8 104.3,13.8 109.4,18.9 119.405,18.9 R7.3@121.2,20.695
BAL_8: Q8.4 R8.3 | length 26
  Top Layer w1: Q8.4@147.475,12.275 Q8.4@148.9,13.7
  Top Layer w3: Q8.4@148.9,13.7 152.1,13.7 157.3,18.9 166.8,18.9 169,21.1 R8.3@169,21.9
CANH: J2.5 J3.5 U5.7 | length 28.5
  Top Layer w0.254: J3.5@193.298,35.059 193.298,35.902 192.1,37.1 189.7,37.1 189.302,36.702 189.302,34.002 188.555,33.255 U5.7@187.4,33.255 186.355,33.255 184.1,31 184.1,29.1 186.9,26.3 190.4,26.3 193.141,29.041 J2.5@193.802,29.041
CANL: J2.4 J3.4 U5.6 | length 15.3
  Top Layer w0.254: U5.6@187.4,30.715 U5.6@187.522,30.837 ; U5.6@187.4,30.9 U5.6@187.585,30.9 ; J3.4@190.298,35.059 190.298,33.613 U5.6@187.522,30.837 ; J2.4@196.302,29.041 194.506,30.837 U5.6@187.522,30.837
CMU_ACTIVE_GLV: R61.1 U12.2 | length 2.8
  Bottom Layer w0.254: U12.2@185.225,35.411 187.011,35.411 R61.1@187.7,36.1
CMU_ACTIVE_HV: R62.1 U12.3 VR1.2 | length 34.3
  Top Layer w0.254: v2(155.3,36.6) VR1.2@157.76,36.6 ; v2(177.7,34.4) 179.1,34.4 179.627,34.927 179.627,37.773 R62.1@179.6,37.8
  Signal Layer 1 w0.254: v2(155.3,36.6) 157.6,34.3 172.1,34.3 172.9,33.5 176.8,33.5 176.998,33.698 177.001,33.698 177.413,34.109 177.413,34.113 v2(177.7,34.4)
  Bottom Layer w0.254: v2(177.7,34.4) 178.711,35.411 U12.3@180.025,35.411
CMU_PWR2: R60.1 U12.4 | length 8.3
  Top Layer w0.254: R60.1@175.1,37.8 175.7,37.2 175.7,35.2 176.5,34.4 v2(176.711,34.4)
  Bottom Layer w0.254: v2(176.711,34.4) 176.998,34.687 176.998,34.691 177.409,35.102 177.412,35.102 178.911,36.6 U12.4@179.944,36.6
EMIT_1: R79.2 U21.3 | length 6.5
  Top Layer w0.254: U21.3@160.475,41.111 162.111,41.111 164,43 R79.2@166.2,43
EMIT_2: R51.2 U19.3 | length 7.8
  Top Layer w0.254: U19.3@112.375,41.011 113.611,41.011 116.9,44.3 R51.2@118.8,44.3
EMIT_3: R52.2 U18.3 | length 5.9
  Top Layer w0.254: U18.3@66.169,41.311 67.002,42.144 67.002,42.702 67.327,43.027 70.948,43.027 R52.2@70.975,43
EMIT_4: R53.2 U17.3 | length 3.3
  Top Layer w0.254: R53.2@22,41.9 23.1,40.8 U17.3@24.814,40.8
EMIT_5: R54.2 U16.3 | length 4.5
  Top Layer w0.254: R54.2@15.6,28.8 16.8,28.8 17.6,28 17.6,26.7 17.743,26.557 U16.3@18.457,26.557
EMIT_6: R55.2 U15.3 | length 4.1
  Top Layer w0.254: R55.2@57.1,20.8 57.625,20.8 59.614,22.789 U15.3@60.425,22.789
EMIT_7: R56.2 U11.3 | length 4.6
  Top Layer w0.254: R56.2@105.05,20.7 105.925,20.7 108.014,22.789 U11.3@108.825,22.789
EMIT_8: R57.2 U10.3 | length 8.6
  Top Layer w0.254: R57.2@152.1,20.8 159.564,20.8 U10.3@160.375,21.611
GATE_1: Q1.1 R41.2 R79.1 | length 4.2
  Top Layer w0.254: R79.1@166.2,41.2 167.085,42.085 168.2,42.085 168.385,41.9 R41.2@170,41.9
GATE_2: Q2.1 R49.2 R51.1 | length 4.9
  Top Layer w0.254: R51.1@118.8,42.5 Q2.1@120.985,42.5 ; Q2.1@120.985,43.295 Q2.1@120.985,42.5 ; R49.2@122.9,42.5 Q2.1@120.985,42.5
GATE_3: Q3.1 R32.2 R52.1 | length 6.8
  Top Layer w0.254: R52.1@70.975,41.2 R32.2@75.6,41.2 ; 73.61,41.24 Q3.1@73.61,43.445
GATE_4: Q4.1 R53.1 R58.1 | length 15
  Top Layer w0.254: R53.1@20.2,41.9 19.1,40.8 17.6,40.8 R58.1@16.5,41.9 18.2,43.6 Q4.1@26.16,43.6
GATE_5: Q5.1 R54.1 R59.2 | length 6.4
  Top Layer w0.254: R59.2@9.7,28.8 12.5,28.8 ; Q5.1@12.5,25.85 12.5,28.8 ; 13.2,28.8 12.5,28.8
GATE_6: Q6.1 R55.1 R83.2 | length 5.8
  Top Layer w0.254: R83.2@53.1,22.6 55.1,22.6 ; Q6.1@55.1,20.785 55.1,22.6 ; R55.1@57.1,22.6 55.1,22.6
GATE_7: Q7.1 R56.1 R84.2 | length 6
  Top Layer w0.254: R84.2@100.5,22.5 R56.1@104.8,22.5 ; Q7.1@102.915,20.77 102.915,22.485
GATE_8: Q8.1 R57.1 R85.2 | length 5.9
  Top Layer w0.254: R85.2@148,22.6 150,22.6 ; Q8.1@150,20.77 150,22.6 ; R57.1@152.1,22.6 150,22.6
GLV: C15.1 J2.2 J3.2 VR2.1 | length 23.1
  Top Layer w0.5: v2@191.833,38.6 193,38.6 193.298,38.898 J3.2@193.298,39.689 ; J2.2@193.302,24.411 195.391,26.5 v2(196,26.5) ; C15.1@195.8,32.3 195.8,31.399 v2(196,31.2)
  Signal Layer 2 w0.5: v2(191.833,38.667) 191.833,35.366 v2(196,31.2) v2(196,26.5)
  Bottom Layer w0.5: v2(196,26.5) 196.6,26.5 197.085,26.985 VR2.1@197.085,27.8
GND_CELL: C1.1 C2.1 C3.1 C4.1 C5.1 C6.1 C7.1 C8.1 C9.1 C10.1 C11.1 C12.1 C13.1 C16.1 C20.1 C21.1 C22.1 C38.2 C39.2 C40.2 C41.2 C50.1 C52.1 C99.1 J1.6 pad.@182.735,52 Q1.3 Q9.2 R9.1 R10.1 R11.1 R12.1 R13.1 R14.1 R15.1 R16.1 R25.2 R26.2 R27.2 R28.2 R29.2 R30.2 R31.2 R41.1 R50.1 R62.2 R69.1 R88.1 R89.2 R90.1 R91.2 R99.1 TH1.1 TH2.1 TH3.1 TH4.1 TH5.1 TH6.1 TH7.1 TH8.1 U1.5 U5.4 U6.11 U7.11 U20.7 U20.8 VR1.3 | length 268.6
  Top Layer w0.254: R13.1@28,26.1 28,28.7 28.9,29.6 TH4.1@28.9,32.2 ; R12.1@33.9,40 33.9,35.5 v2(34,35.4) ; C52.1@52,26.6 52,27.4 52.5,27.9 v2(52.8,27.9) ; v2(54,32.3) 54.3,32 R30.2@55.5,32 57.3,33.8 R27.2@58.7,33.8 ; R11.1@56.5,39.9 56.538,39.9 57.565,38.873 65.227,38.873 v2(67.8,36.3) ; C3.1@66.1,27.8 66.1,29.912 65.235,30.777 65.223,30.777 64.2,31.8 64.2,32.9 64.7,33.4 67.4,33.4 ; C5.1@66.1,35.4 66.1,34.7 67.9,32.9 TH6.1@67.9,32.2 ; R89.2@75.1,38.5 75.1,37.104 77.054,35.15 78.324,35.15 78.474,35 v2(78.474,33.826) ; C20.1@79.2,38.5 79.2,38 v2(79.8,37.4) ; R14.1@80.5,25.5 80.9,25.9 C21.1@82.9,25.9 83.9,24.9 88.893,24.9 90.493,26.5 92.3,26.5 ; C22.1@89.3,29.5 92.3,26.5 ; C10.1@98.3,35.3 98.3,35.8 97.4,36.7 97.4,39.862 97.838,40.3 104.6,40.3 R10.1@106.1,38.8 ; C9.1@102.7,35.8 105.7,38.8 R10.1@106.1,38.8 ; C40.2@106.3,24.3 104.4,24.3 C38.2@102.7,26 v2(102.7,27.8) 99.6,27.8 J1.6@99.4,27.6 98.3,26.5 92.3,26.5 ; v2(109.4,34.6) 109.4,35.2 109.1,35.5 U1.5@109.1,36.4 109.1,37.711 ; R99.1@111.1,24.1 111.1,25.6 C39.2@111.5,26 ; C39.2@111.3,26.2 112.1,25.4 v2(112.2,25.4) ; C41.2@111.7,38.8 111.7,39.3 111.1,39.9 109.7,39.9 109.446,39.646 109.446,38.057 109.1,37.711 ; TH7.1@117.36,31.8 117.36,29.84 C2.1@118.4,28.8 ; C1.1@118.4,26.1 v2(119.8,26.1) ; C7.1@118.5,34.8 117.2,36.1 118.5,37.4 C8.1@118.5,37.5 ; v2@119.827,23.873 123.635,23.873 124.662,24.9 R15.1@124.7,24.9 ; v2(120,36.4) 120.6,37 R90.1@122.9,37 ; U6.11@135.1,31.8 136.3,31.8 138.197,29.903 143.997,29.903 144.4,29.5 144.4,28.3 144.773,27.927 146.673,27.927 147.1,27.5 147.1,24.7 146.673,24.273 144.1,24.273 R16.1@144.1,24.3 ; v2(140.2,36.6) C50.1@140.2,37.6 ; R9.1@150.8,35.8 150.862,35.8 153.5,33.162 153.5,31.9 152.7,31.1 R91.2@152,31.1 v2(152,30) 153.4,28.6 153.95,28.6 155.95,26.6 R50.1@158.1,26.6 ; 161.3,38.4 VR1.3@164.1,35.6 ; VR1.3@164.3,35.4 166.8,35.4 173.1,35.4 C16.1@173.4,35.7 ; R88.1@166.9,27.7 167.738,27.7 168.865,26.573 170.935,26.573 171.762,27.4 ; TH1.1@168.3,30.5 169.6,29.2 171,29.2 171.762,28.438 171.762,27.4 ; U5.4@177.8,28.175 175.825,28.175 175.4,28.6 174.2,28.6 173,27.4 171.762,27.4 ; R10.1@106.1,38.8 R10.1@106.5,38.8 107.589,37.711 109.1,37.711
  Top Layer w0.6: v2(38.7,32) 41.3,32 43.1,33.8 44,33.8 44.9,32.9 U7.11@47.1,32.9 ; TH2.1@125,31.8 125.9,32.7 129.2,32.7 131,30.9 132.6,30.9 133.5,31.8 U6.11@135.1,31.8
  Top Layer w0.8: C12.1@161.3,26.7 VR1.3@161.3,33.8 ; 161.3,38.4 C99.1@161.3,39.6
  Top Layer w1: VR1.3@166.8,35.4 166.8,37.3 169.545,40.045 v2@171.6,40.045 ; v2(171.6,40.1) 172.2,40.1 ; 173,40.9 172.2,40.1 ; R62.2@177.8,37.8 177.8,38.9 176.6,40.1 172.2,40.1
  Top Layer w3: Q1.3@173,42.5 173,43.6 174.8,45.4 179.3,45.4 179.5,45.6 182.147,48.248 182.3,48.4 182.3,51.565 pad.@182.735,52
  other v1: 184.2,49.1 185.25,49.825 185.82,50.775 179.67,50.85 185.989,51.978 179.395,52 185.67,53.2 179.67,53.25 180.345,54.25 185.045,54.3 181.37,54.95 183.945,54.95 182.72,55.275
  other v2: 119.8,23.9 161.3,27.7 161.3,29.7 161.3,32 143.892,32.905 117.2,36.1 168.4,38.9
GND_GLV: C14.1 C15.2 C17.1 J2.1 J3.1 R61.2 R63.2 U5.5 VR2.4 | length 33.1
  Top Layer w0.254: v2(189.1,38.7) 189.998,39.598 J3.1@190.298,39.598 ; C17.1@190.2,32.1 190.2,32.2 v2(191.7,33.7) 192.2,33.2 193.7,33.2 194.5,32.4 C14.1@194.5,32.3
  Top Layer w0.5: U5.5@187.4,28.175 188.475,27.1 v2(189.2,27.1) ; J3.1@190.298,39.598 190.7,40 v2(191.8,40) ; v2(194.9,23.5) 194.9,24.4 v2(194.911,24.411) J2.1@196.302,24.411 197.6,25.709 197.6,30.9 197.2,31.3 C15.2@197.2,32.3
  Bottom Layer w0.254: v2(189.1,38.7) 189.2,38.7 189.9,38 189.9,36.5 R61.2@189.5,36.1
  Bottom Layer w0.5: v2(189.2,27.1) R63.2@189.2,28.4 ; v2(191.8,40) 192.7,40 194.8,37.9 VR2.4@194.8,35.2
HEAT1: R1.2 R2.2 R3.2 R4.2 | length 170.1
  Top Layer w5: 2.9,61.3 173.05,61.3
HEAT2: R5.2 R6.2 R7.2 R8.2 | length 170.1
  Top Layer w5: 2.85,2.7 173,2.7
LED_1: D1.2 R90.2 | length 2.4
  Top Layer w0.254: R90.2@124.7,37 D1.2@124.7,39.4
LED_PWR: D2.2 R91.1 | length 4.9
  Top Layer w0.254: D2.2@148.8,35.8 148.8,35.4 149.9,34.3 151,34.3 152,33.3 R91.1@152,32.9
MISO: J1.1 R81.1 U1.1 | length 46.4
  Top Layer w0.254: R81.1@71.5,30.4 72.8,30.4 73.9,31.5 v2(78.3,31.5) ; v2(95,31.5) J1.1@95,32.8 ; v2(112.1,34.6) 112.3,34.8 U1.1@112.3,36.4
  Signal Layer 1 w0.254: v2(78.3,31.5) v2(95,31.5) 97.807,31.5 98.909,30.398 101.34,30.398 104.088,33.146 110.646,33.146 v2(112.1,34.6)
MOSI: J1.4 R82.1 U1.2 | length 48.7
  Top Layer w0.254: R82.1@71.4,26.7 72.308,27.608 79.549,27.608 80.275,28.334 80.275,30.875 81.9,32.5 v2(82.4,32.5) ; v2(99.2,31.1) 99.2,30.4 J1.4@99.4,30.2 ; v2(111.1,34.6) 111.5,35 U1.2@111.5,36.4
  Signal Layer 1 w0.254: v2(82.4,32.5) 97.449,32.5 98.849,31.1 v2(99.2,31.1) 99.4,30.9 101.2,30.9 103.9,33.6 110.1,33.6 v2(111.1,34.6)
MUX_A: R80.2 U20.11 | length 14.8
  Top Layer w0.254: R80.2@69.6,38.5 71.2,36.9 71.775,36.9 76.473,32.202 79.123,32.202 79.644,31.681 U20.11@79.644,29.7
MUX_B: R81.2 U20.10 | length 10.9
  Top Layer w0.254: R81.2@69.7,30.4 70.9,29.2 72.242,29.2 74.088,31.046 77.761,31.046 78.009,30.798 78.027,30.798 78.374,30.451 U20.10@78.374,29.7
MUX_C: R82.2 U20.9 | length 9.1
  Top Layer w0.254: R82.2@69.6,26.7 71.6,28.7 72.384,28.7 73.784,30.1 76.704,30.1 U20.9@77.104,29.7
MUX_COM: C20.2 R68.1 U1.13 U20.3 | length 39.7
  Top Layer w0.254: C20.2@80.6,38.5 R68.1@83.3,38.5 ; U20.3@83.454,35.1 83.454,38.346 R68.1@83.3,38.5 ; U20.3@83.554,35.146 U20.3@83.554,35.775 ; U1.13@105.3,31.8 102.5,31.8 102,31.3 102,29.7 101.538,29.238 93.025,29.238 92.379,29.884 92.379,33.758 92.4,33.779 92.4,35.7 91.354,36.746 88.95,36.746 88.3,37.396 88.3,38.5 87.273,39.527 84.365,39.527 83.638,38.8 83.3,38.8 R68.1@83.3,38.5
MUX_INH: R89.1 U20.6 | length 4.4
  Top Layer w0.254: R89.1@76.9,38.5 77.7,38.5 79.744,36.456 U20.6@79.744,35.775
N_DRAIN: Q9.3 R97.1 | length 3.7
  Top Layer w0.254: R97.1@152,28.2 152.3,28.2 154.3,26.2 Q9.3@154.9,26.2
N_GATE: Q9.1 R50.2 R95a.2 R95b.2 | length 11.5
  Top Layer w0.254: R95b.2@152.8,35.8 153.8,35.8 154.9,34.7 R95a.2@154.9,32.9 154.9,32.862 155.927,31.835 155.927,28.6 155.85,28.6 156.05,28.4 R50.2@158.1,28.4
OPAMP-N1: R40.1 U6.6 | length 3.5
  Top Layer w0.6: U6.6@139.9,34.34 141.34,34.34 142.3,35.3 R40.1@143,35.3
OPAMP-N2: R39.1 R48.2 U6.9 | length 10.2
  Top Layer w0.6: R39.1@131.5,34.7 132.7,34.7 133.06,34.34 U6.9@135.1,34.34 136.44,34.34 136.9,34.8 136.9,36.2 136.69,36.41 135.683,36.41 134.6,37.493 R48.2@134.6,37.7
OPAMP-N3: R38.1 R47.2 U7.6 | length 19
  Top Layer w0.254: R38.1@55.5,35.8 56.3,35.8 v2(56.8,35.3) ; v2(63.7,36.5) 66.4,36.5 67.4,35.5 R47.2@69.6,35.5
  Top Layer w0.6: U7.6@51.9,35.44 53.74,35.44 54.1,35.8 R38.1@55.5,35.8
  Signal Layer 1 w0.254: v2(56.8,35.3) 62.5,35.3 v2(63.7,36.5)